# Altium PCB FPV0-3.PcbDoc (part 1 of 6)
Units mm, origin at the board's own origin, x right, y up, seen from the top; angles counter-clockwise.
Board outline 81.28 x 53.34 mm, 4 copper layers (Top Layer, GND Plane 1, 3v3 Plane 2, Bottom Layer); 178 components, 250 nets, 836 pads, 217 vias.
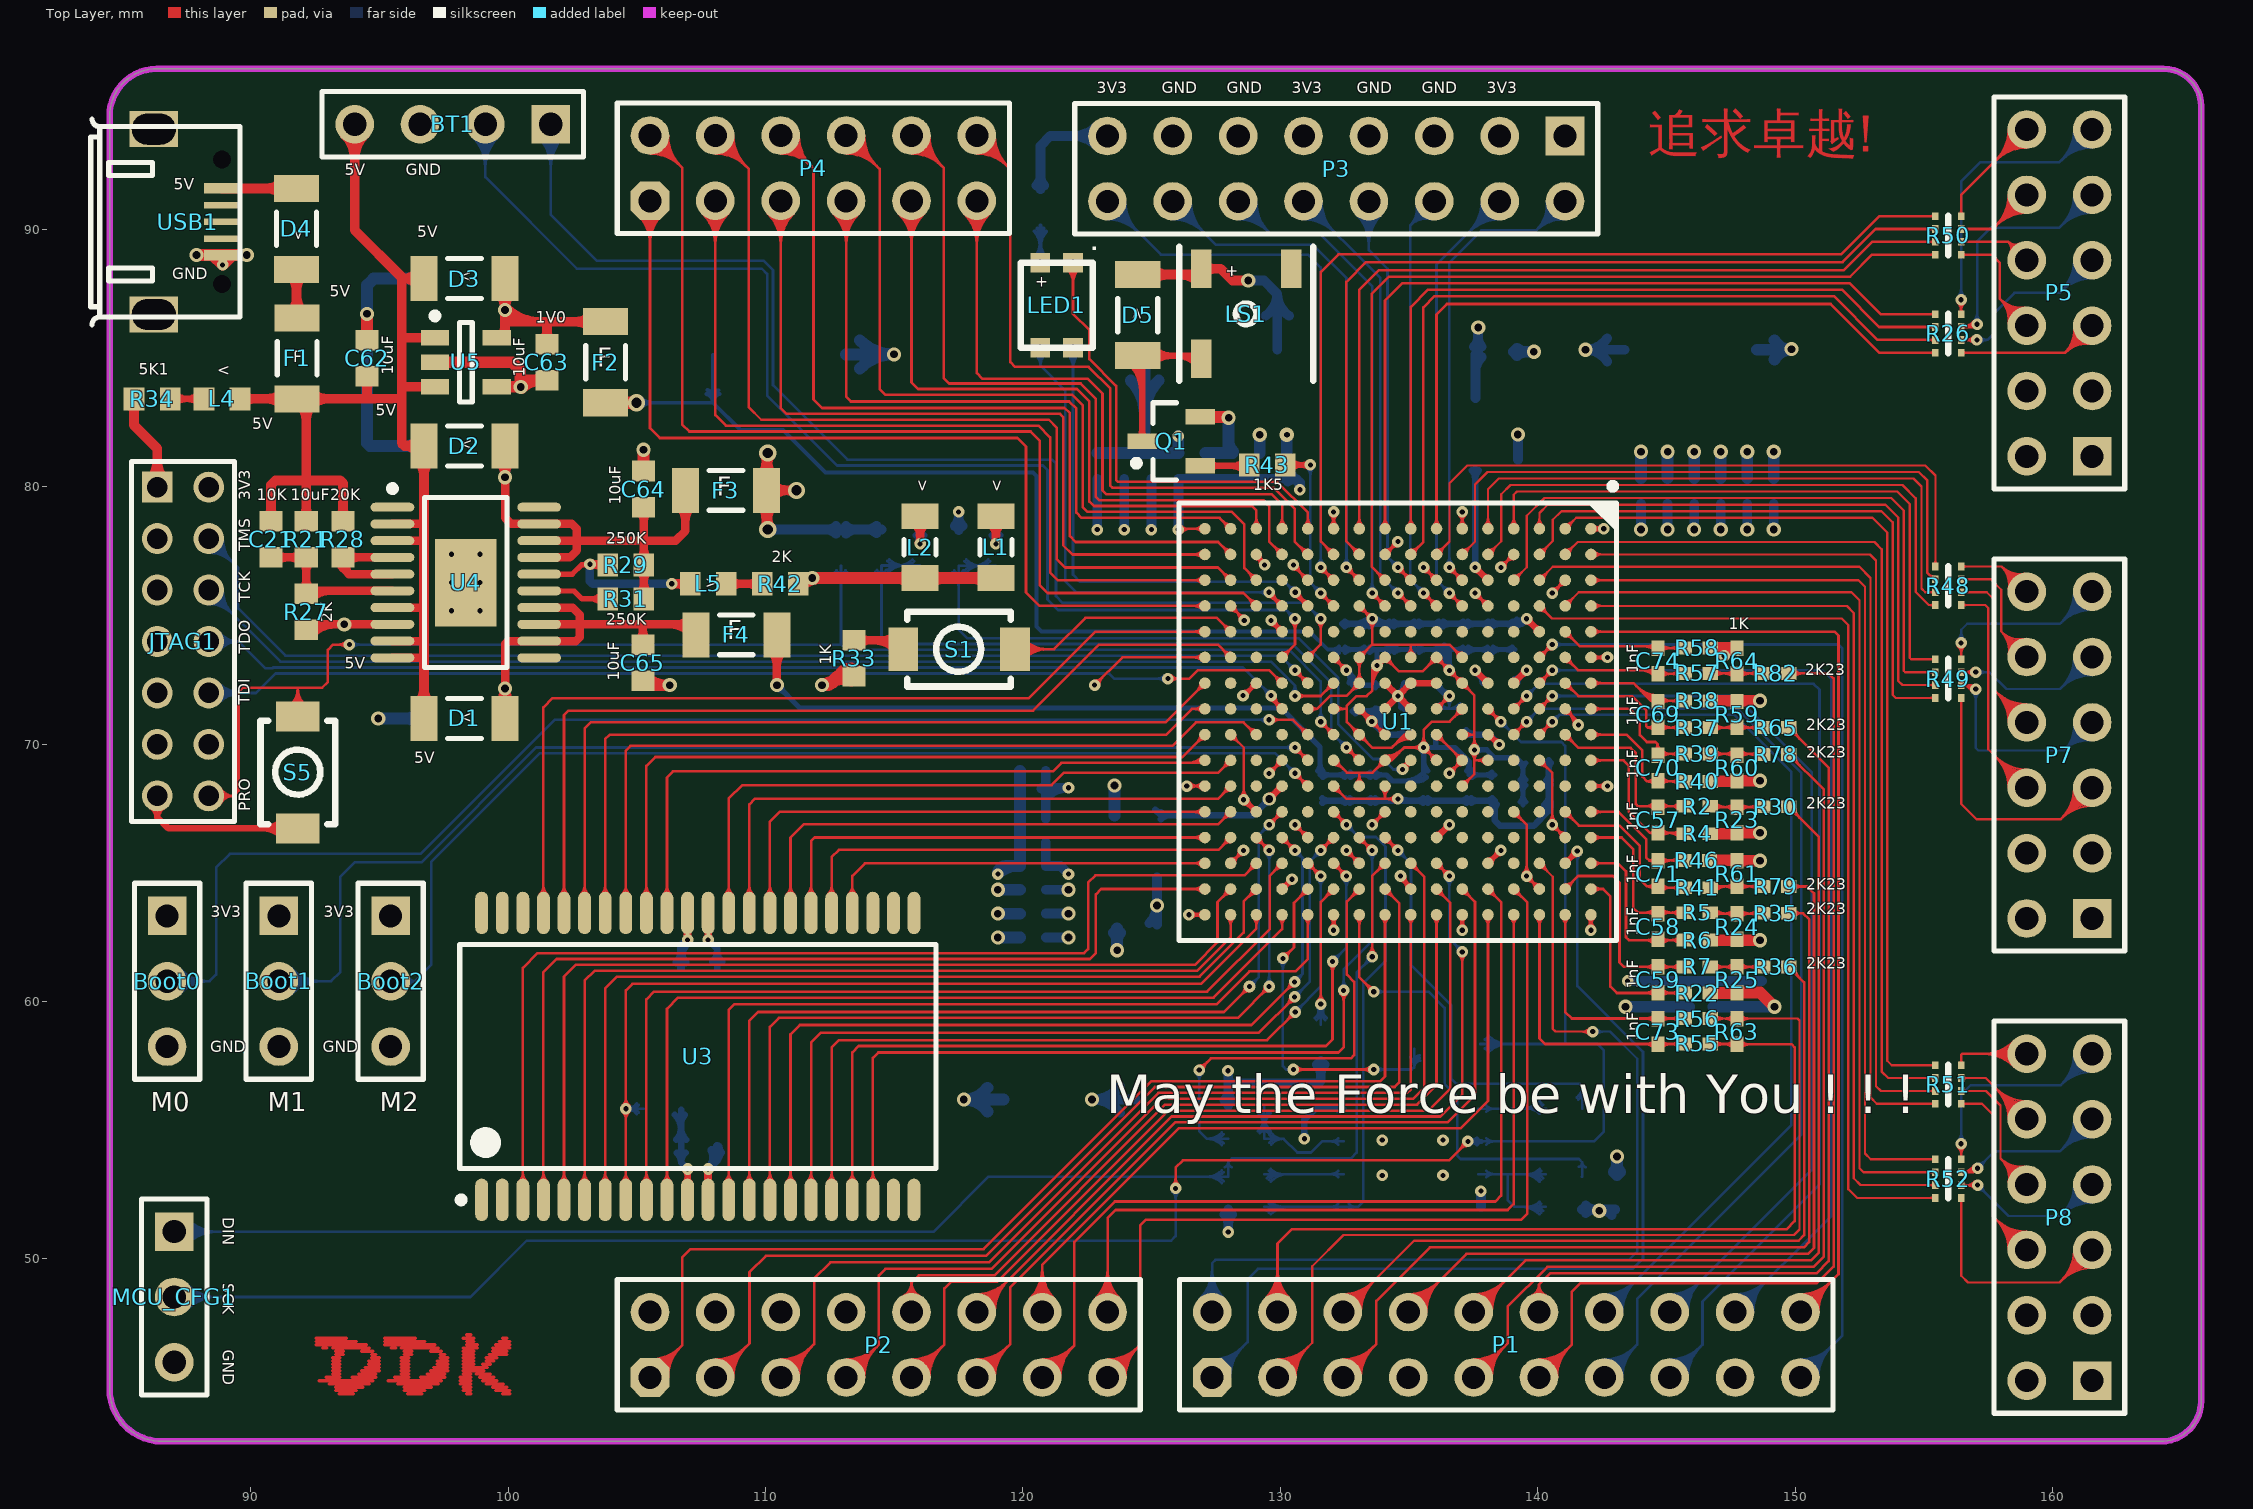
[diagram p0: Top Layer view]
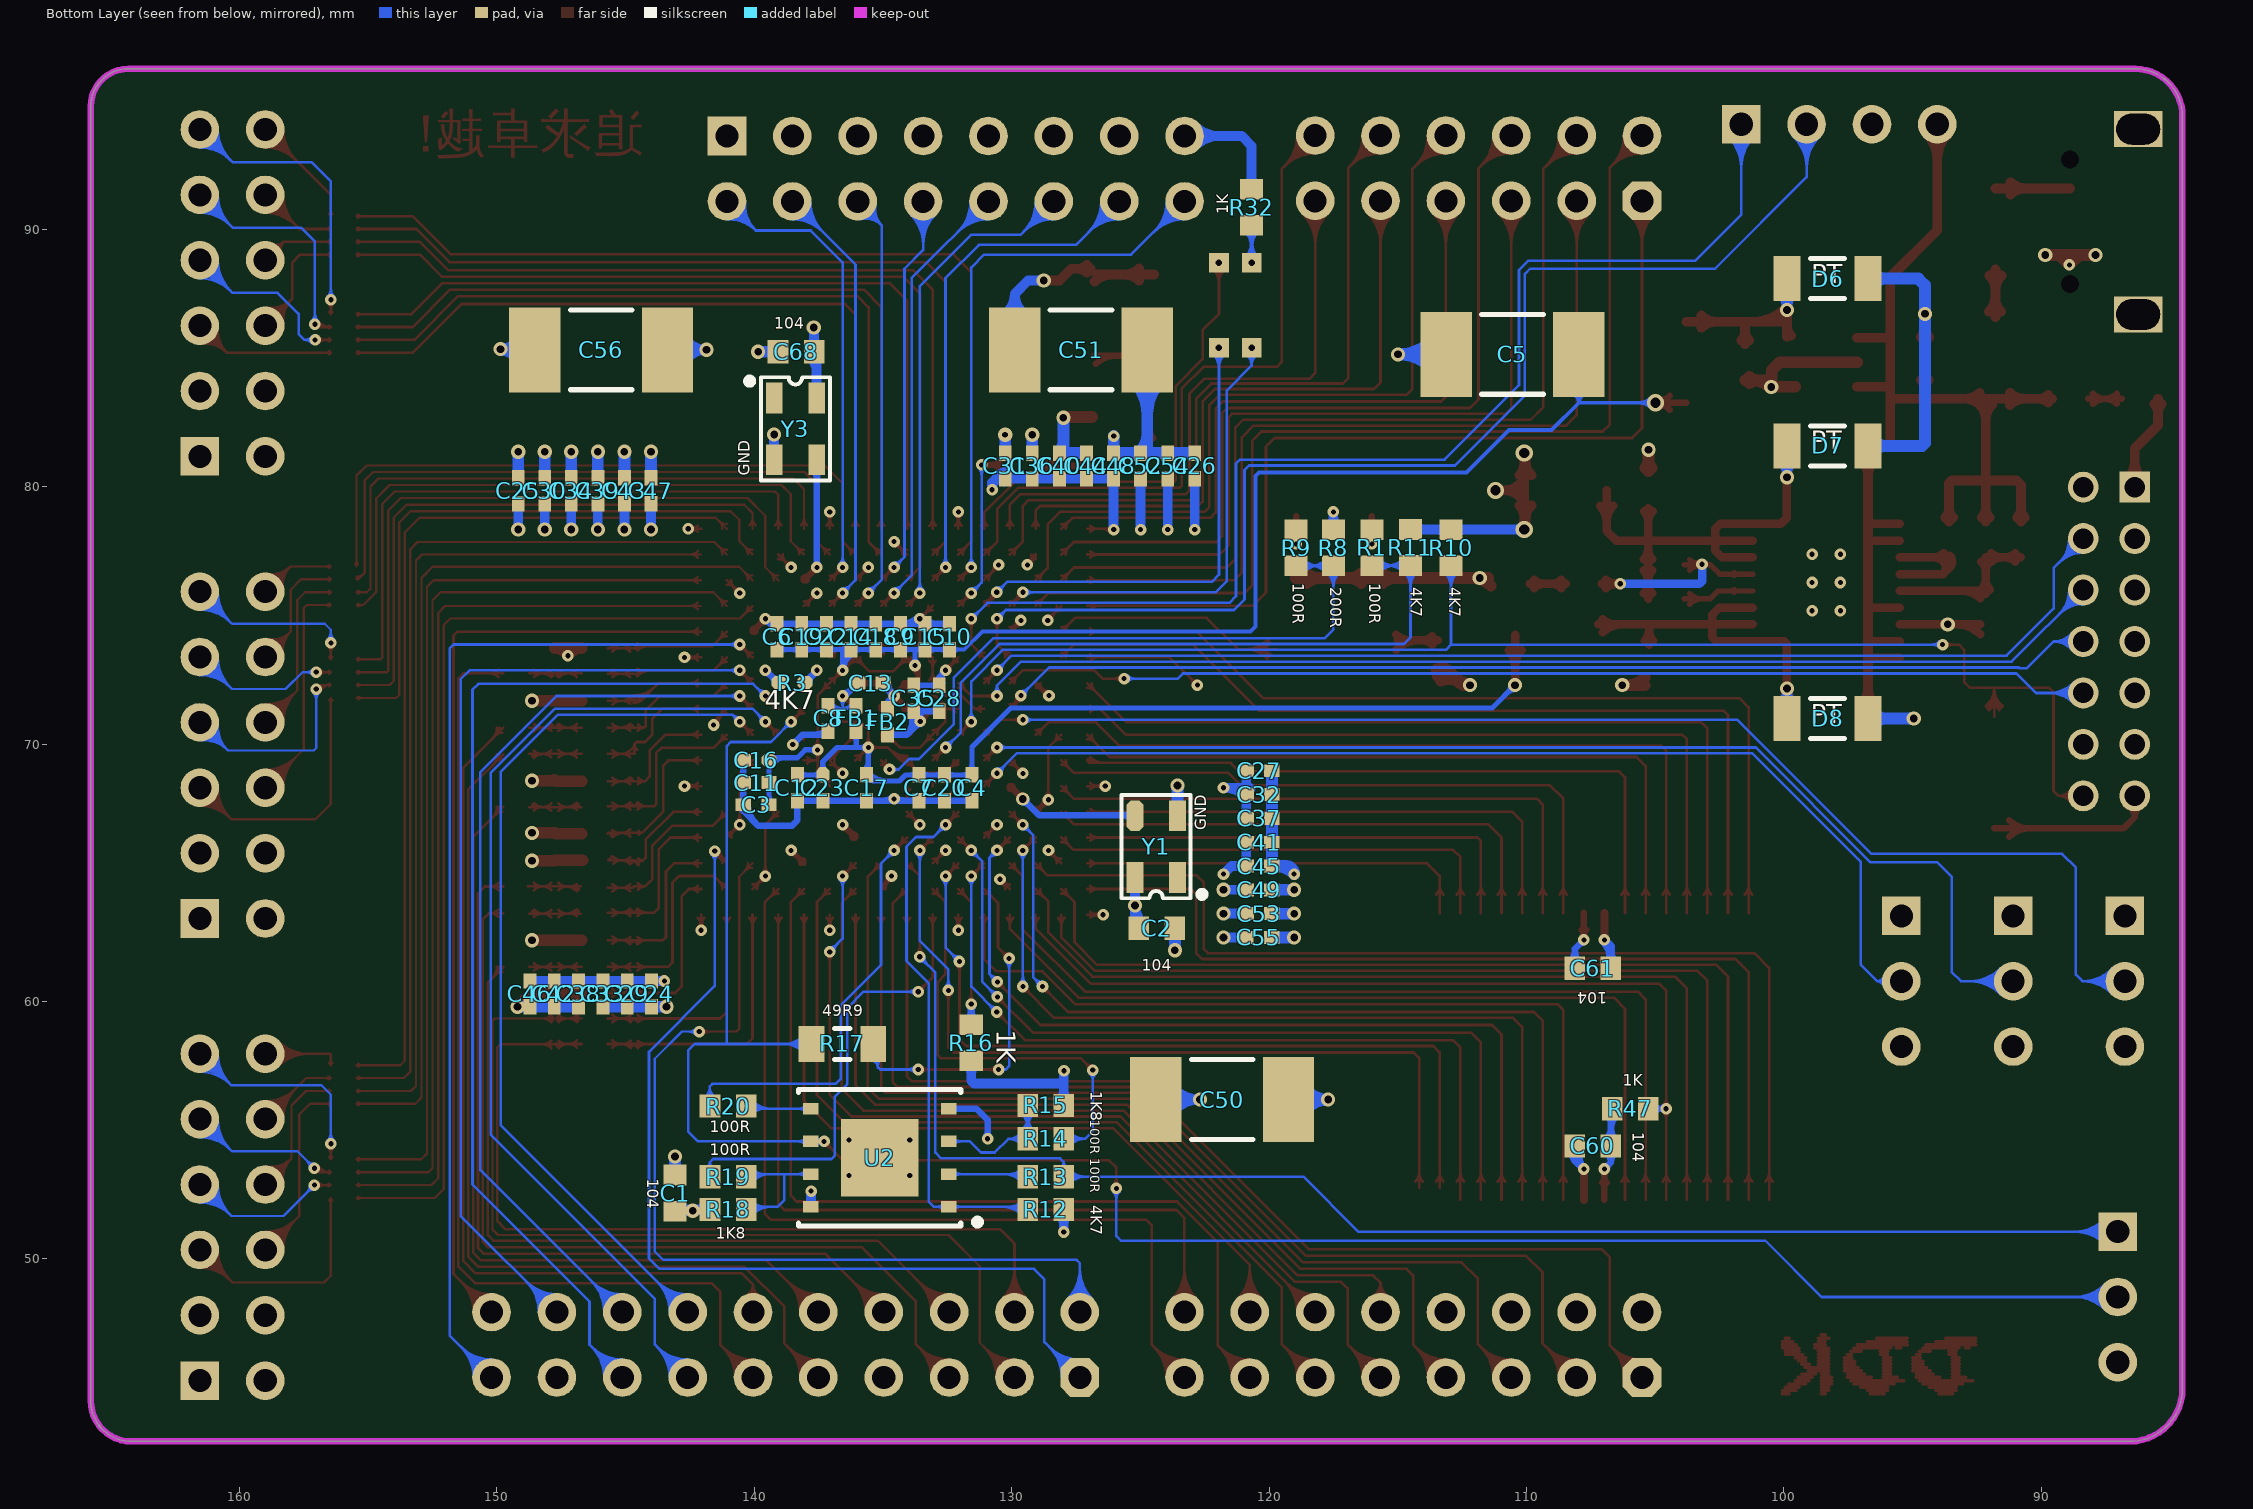
[diagram p1: Bottom Layer view, seen from below]
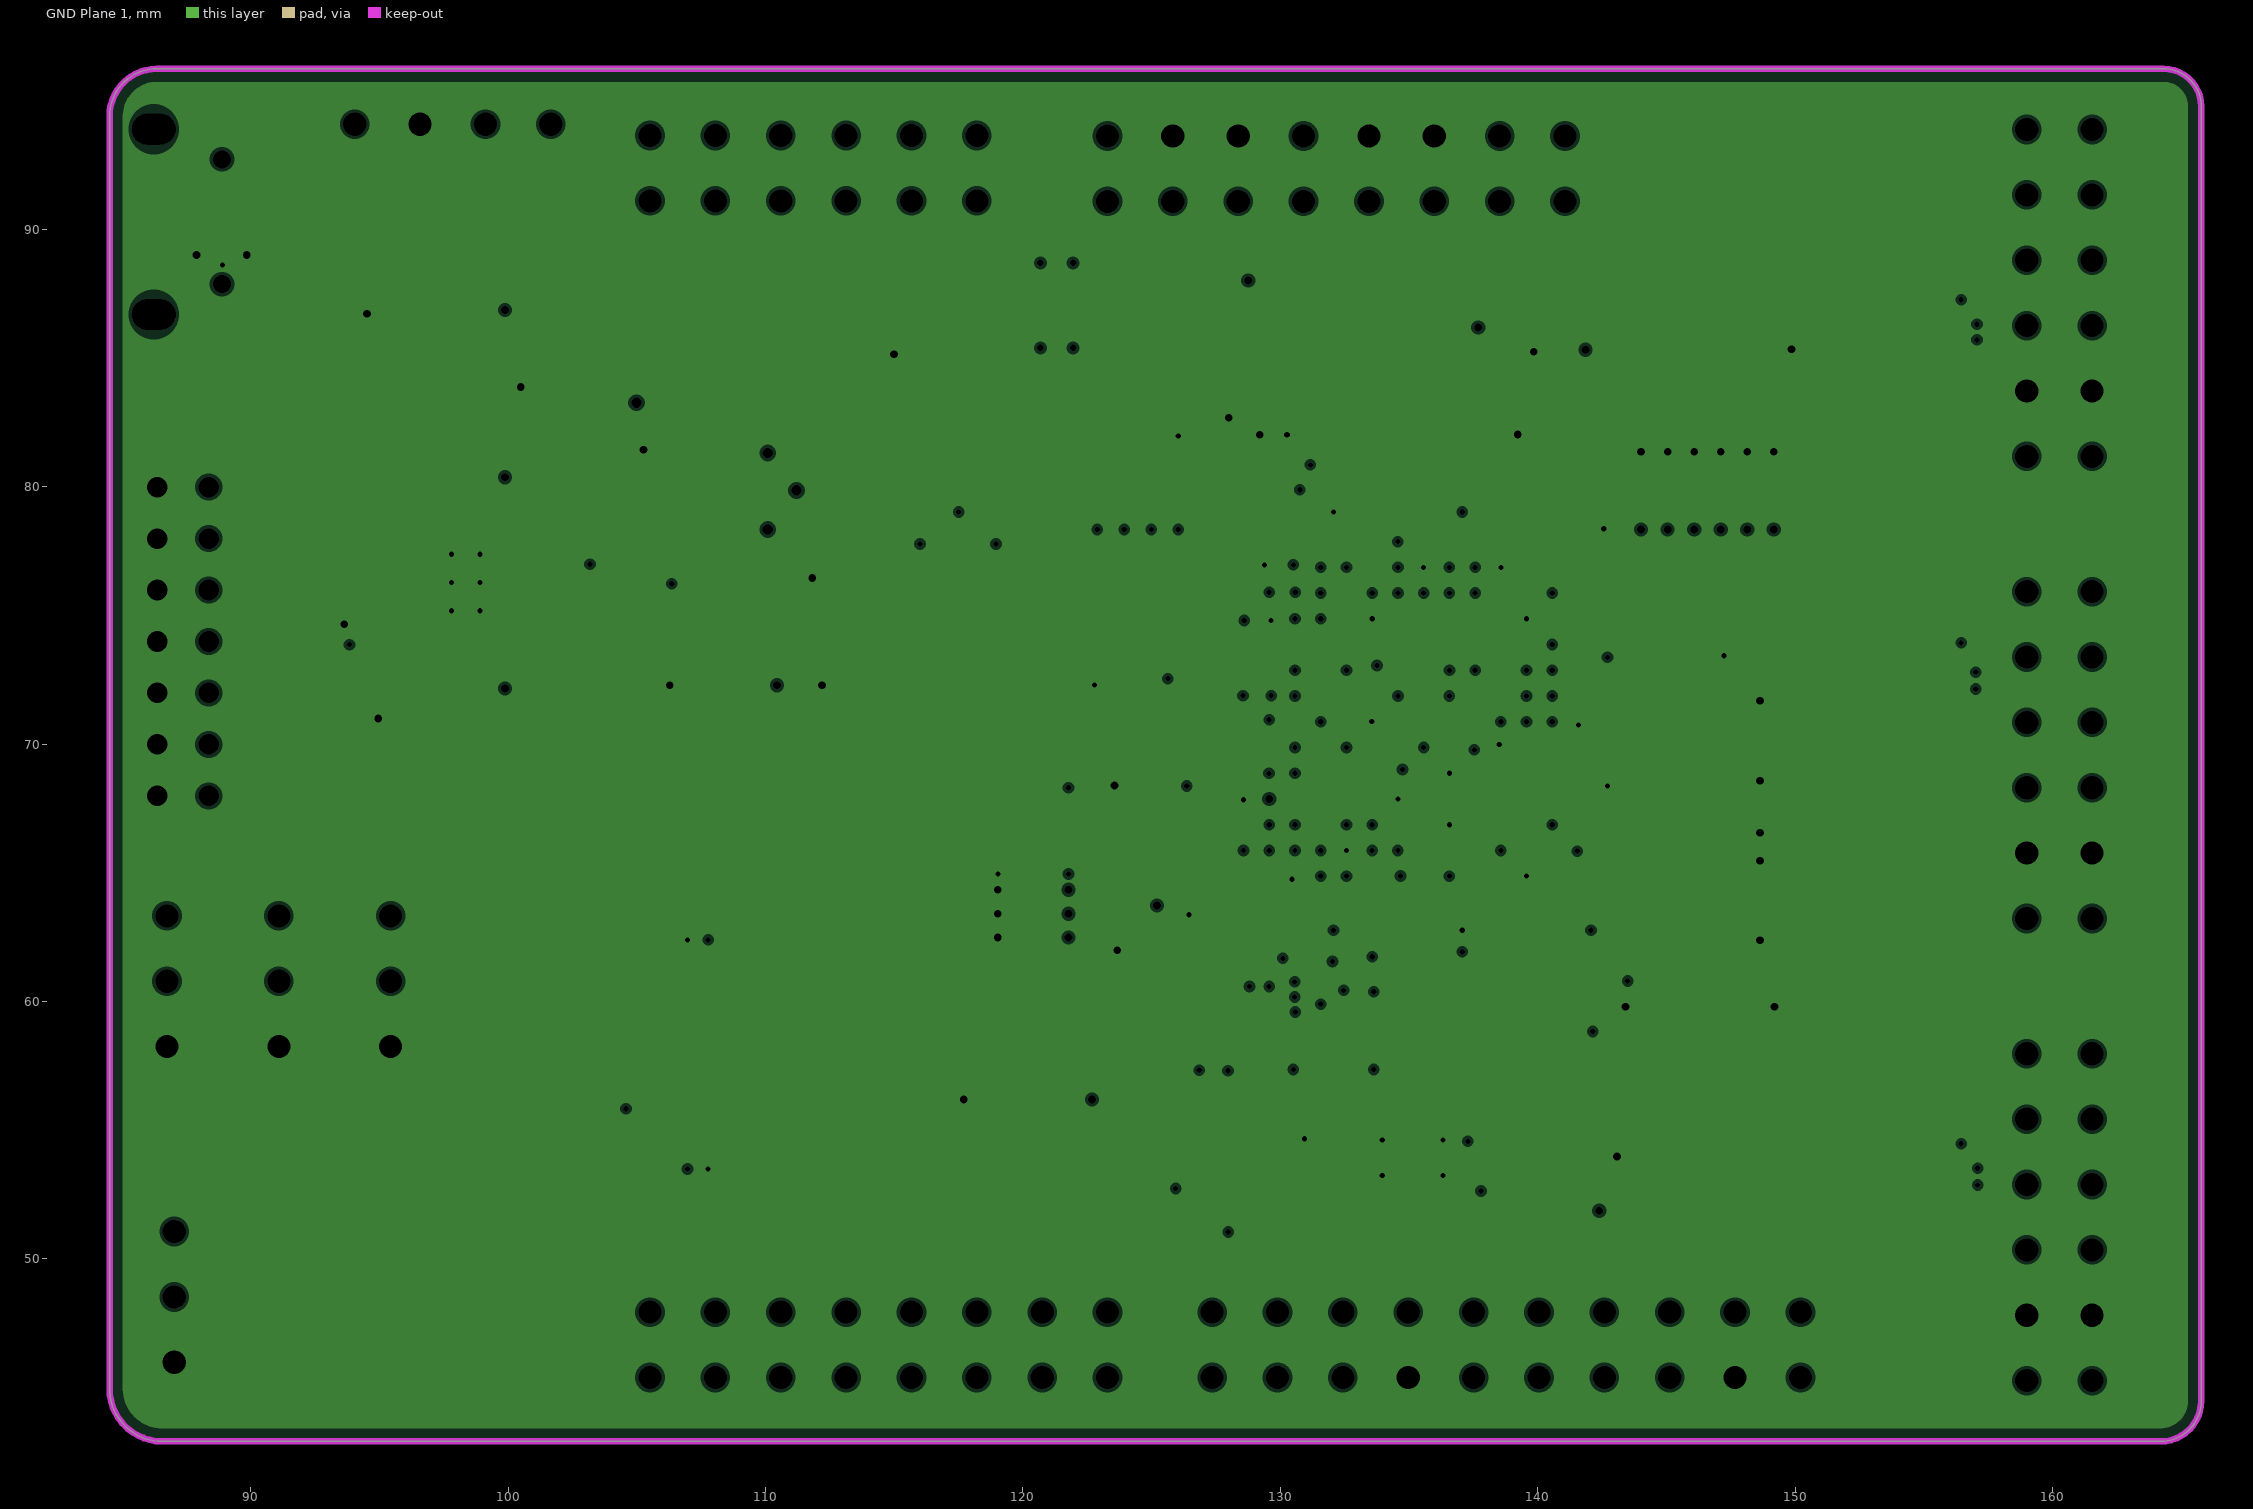
[diagram p2: GND Plane 1, clearances drawn from the general rule]
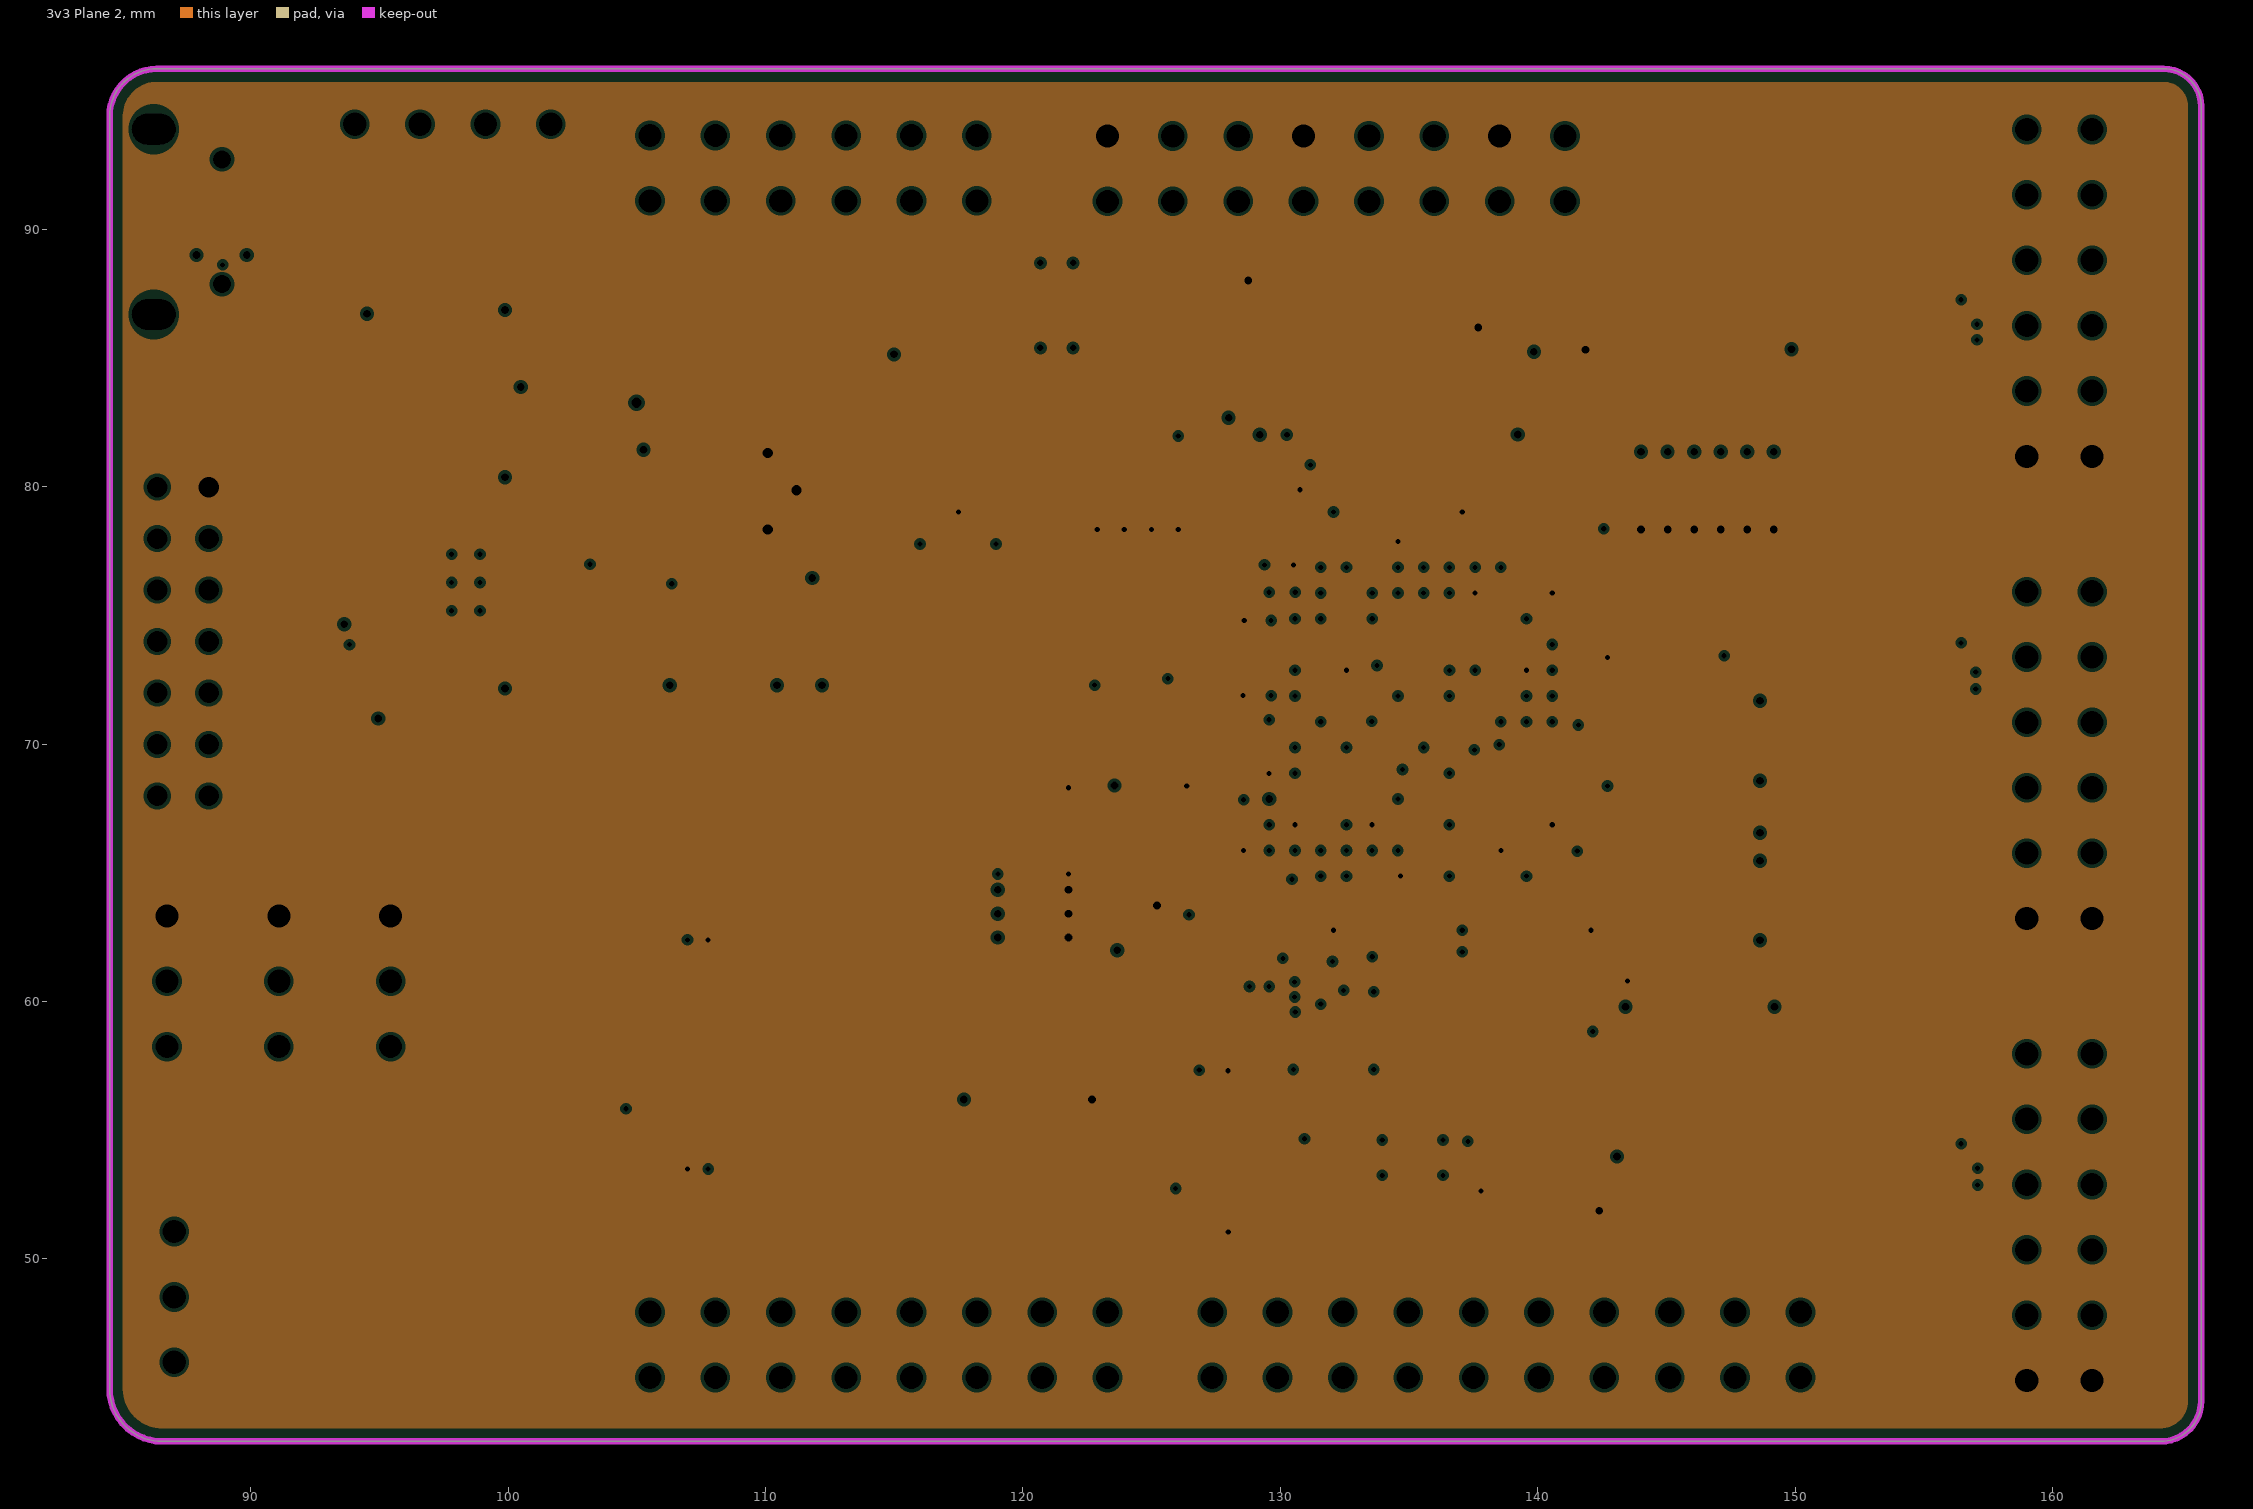
[diagram p3: 3v3 Plane 2, clearances drawn from the general rule]

## Layer stack, top to bottom
Top Layer: signal copper 0.0356
Dielectric: core 0.32, FR-4, Dk 4.8
GND Plane 1: plane copper 0.0356, net GND
Dielectric: prepreg 0.32, FR-4, Dk 4.8
3v3 Plane 2: plane copper 0.0356, net 3V3
Dielectric: core 0.32, FR-4, Dk 4.8
Bottom Layer: signal copper 0.0356

## Board outline
84.506,44.951 84.506,94.401 cw(c86.346,94.401) 86.346,96.241 164.316,96.241 cw(c164.316,94.771) 165.786,94.771 165.786,44.481 cw(c164.206,44.481) 164.206,42.901 86.556,42.901 cw(c86.556,44.951)

## Design rules (kind name [scope] priority, off if disabled: settings)
Clearance ne2rvia [(IsPad OR IsVia)] p1: gap=0.127
Clearance all [All] p2: gap=0.089
DiffPairsRouting [All] p1: maxlimit=0.254 minlimit=0.254 mostfreqgap=0.254 maxuncoupledlength=12.7
PlaneClearance [All] p1: clearance=0.127
PlaneConnect [All] p1: planeconnectstyle=Direct reliefexpansion=0.508 reliefentries=4 reliefconductorwidth=0.254 reliefairgap=0.254
PolygonConnect [All] p1: connectstyle=Relief reliefconductorwidth=0.254 reliefentries=4 polygonreliefangle="90 Angle" airgapwidth=0.254
RoutingVias [All] p1: holewidth=0.711 width=1.27 viastyle="Through Hole" minholewidth=0.2 minwidth=0.45 maxholewidth=0.711 maxwidth=1.27
SolderMaskExpansion [All] p1: expansion=0.025
Width [All] p1: maxlimit=1.27 minlimit=0.089 preferedwidth=0.254 minimp=50.000000 maximp=50.000000 favimp=50.000000
25 further rules are at their usual default settings.

## Classes and differential pairs
net class QEI_B[3..0]: QEI_B1 QEI_B2 QEI_B3
component class power: C21 C62 C63 C64 C65 D1 D2 D3 D4 D6 D7 D8 F1 F2 F3 F4 L4 L5 R21 R27 R28 R29 R31 R34 R42 U4 U5 USB1
net class SRAM-DQ[7..0]: SRAM-DQ0 SRAM-DQ1 SRAM-DQ2 SRAM-DQ3 SRAM-DQ4 SRAM-DQ5 SRAM-DQ6 SRAM-DQ7
net class SRAM-A[18..0]: SRAM-A0 SRAM-A1 SRAM-A2 SRAM-A3 SRAM-A4 SRAM-A5 SRAM-A6 SRAM-A7 SRAM-A8 SRAM-A9 SRAM-A10 SRAM-A11 SRAM-A12 SRAM-A13 SRAM-A14 SRAM-A15 SRAM-A16 SRAM-A17 SRAM-A18
net class BANK35_IO[42..1]: BANK35_IO1 BANK35_IO2 BANK35_IO3 BANK35_IO4 BANK35_IO5 BANK35_IO6 BANK35_IO7 BANK35_IO8 BANK35_IO9 BANK35_IO10 BANK35_IO11 BANK35_IO12 BANK35_IO13 BANK35_IO14 BANK35_IO15 BANK35_IO16 BANK35_IO17 BANK35_IO18 BANK35_IO19 BANK35_IO20 BANK35_IO21 BANK35_IO22 BANK35_IO23 BANK35_IO24 BANK35_IO25 BANK35_IO26 BANK35_IO27 BANK35_IO28 BANK35_IO29 BANK35_IO30 BANK35_IO31 BANK35_IO32 BANK35_IO33 BANK35_IO34 BANK35_IO35 BANK35_IO36 BANK35_IO37 BANK35_IO38 BANK35_IO39 BANK35_IO40 BANK35_IO41 BANK35_IO42 IO0
component class FPGA_CFG: Boot0 Boot1 Boot2 JTAG1 L1 L2 MCU_CFG1 R1 R3 R8 R9 R10 R11 S5 U1
component class MEMORY: C60 C61 R47 U3
component class IO: BT1 C57 C58 C59 C69 C70 C71 C73 C74 D5 LED1 LS1 P1 P2 P3 P4 P5 P7 P8 Q1 R2 R4 R5 R6 R7 R22 R23 R24 R25 R26 R30 R32 R33 R35 R36 R37 R38 R39 R40 R41 R43 R46 R48 R49 R50 R51 R52 R55 R56 R57 R58 R59 R60 R61 R63 R64 R65 R78 R79 R82 S1
component class FPGA_IO: C1 C2 C68 R12 R13 R14 R15 R16 R17 R18 R19 R20 U2 Y1 Y3
component class FPGA_POWER: C3 C4 C5 C6 C7 C8 C9 C10 C11 C12 C13 C14 C15 C16 C17 C18 C19 C20 C22 C23 C24 C25 C26 C27 C28 C29 C30 C31 C32 C33 C34 C35 C36 C37 C38 C39 C40 C41 C42 C43 C44 C45 C46 C47 C48 C49 C50 C51 C52 C53 C54 C55 C56 FB1 FB2
net class BANK14_IO[10..1]: BANK14_IO1 BANK14_IO2 BANK14_IO3 BANK14_IO4 BANK14_IO5 BANK14_IO6 BANK14_IO7 BANK14_IO8 BANK14_IO9 BANK14_IO10
net class BANK15_IO[36..1]: BANK15_IO1 BANK15_IO2 BANK15_IO3 BANK15_IO4 BANK15_IO5 BANK15_IO6 BANK15_IO7 BANK15_IO8 BANK15_IO9 BANK15_IO10 BANK15_IO11 BANK15_IO12 BANK15_IO13 BANK15_IO14 BANK15_IO15 BANK15_IO16 BANK15_IO17 BANK15_IO18 BANK15_IO19 BANK15_IO20 BANK15_IO21 BANK15_IO22 BANK15_IO23 BANK15_IO24 BANK15_IO25 BANK15_IO26 BANK15_IO27 BANK15_IO28 BANK15_IO29 BANK15_IO30 BANK15_IO31 BANK15_IO32 BANK15_IO33 BANK15_IO34 BANK15_IO35 BANK15_IO36
net class BANK34_IO[20..1]: BANK34_IO1 BANK34_IO2 BANK34_IO3 BANK34_IO4 BANK34_IO5 BANK34_IO6 BANK34_IO7 BANK34_IO8 BANK34_IO9 BANK34_IO10 BANK34_IO11 BANK34_IO12 BANK34_IO13 BANK34_IO14 BANK34_IO15 BANK34_IO16 BANK34_IO17 BANK34_IO18 BANK34_IO19 BANK34_IO20
differential pair AD12: +AD12_P -AD12_N
differential pair AD11: +AD11_P -AD11_N
differential pair AD10: +AD10_P -AD10_N
differential pair AD9: +AD9_P -AD9_N
differential pair AD8: +AD8_P -AD8_N
differential pair AD4: +AD4_P -AD4_N
differential pair AD3: +AD3_P -AD3_N
differential pair AD2: +AD2_P -AD2_N
differential pair AD1: +AD1_P -AD1_N

## Components (designator, comment, footprint, x,y, rotation, side; value= is the part's Value field where it differs from the comment)
Boot0 "Header 3" HDR1X3 86.741,63.322 r270 top
Boot1 "Header 3" HDR1X3 91.084,63.322 r270 top
Boot2 "Header 3" HDR1X3 95.428,63.322 r270 top
BT1 "Header 4" HDR1X4 101.651,94.082 r180 top
C1 "Cap" 1608[0603] 143.078,52.553 r90 bottom (schematic designator C16)
C2 "Cap" 1608[0603] 124.358,62.84 r0 bottom
C3 "Cap" 0402#1 139.929,67.64 r0 bottom
C4 "Cap" 0402#1 131.547,68.301 r270 bottom
C5 "Cap" 2512 110.541,85.141 r0 bottom (schematic designator C20)
C6 "Cap" 0402#1 139.116,74.168 r90 bottom (schematic designator C53)
C7 "Cap" 0402#1 133.604,68.301 r270 bottom
C8 "Cap" 0402#1 137.135,70.993 r90 bottom (schematic designator C29)
C9 "Cap" 0402#1 134.326,74.168 r90 bottom (schematic designator C30)
C10 "Cap" 0402#1 132.41,74.168 r90 bottom (schematic designator C31)
C11 "Cap" 0402#1 139.929,68.504 r0 bottom
C12 "Cap" 0402#1 138.328,68.301 r270 bottom
C13 "Cap" 0402#1 135.484,72.365 r180 bottom (schematic designator C56)
C14 "Cap" 0402#1 136.242,74.168 r90 bottom (schematic designator C96)
C15 "Cap" 0402#1 133.368,74.168 r90 bottom (schematic designator C95)
C16 "Cap" 0402#2 139.929,69.367 r0 bottom
C17 "Cap" 0402#1 135.636,68.301 r270 bottom
C18 "Cap" 0402#1 135.284,74.168 r90 bottom (schematic designator C91)
C19 "Cap" 0402#1 138.158,74.168 r90 bottom (schematic designator C92)
C20 "Cap" 0402#1 132.613,68.301 r270 bottom (schematic designator C90)
C21 "Cap" 1608[0603] 90.78,77.953 r270 top
C22 "Cap" 0402#1 137.2,74.168 r90 bottom (schematic designator C75)
C23 "Cap" 0402#2 137.338,68.301 r270 bottom
C24 "Cap" 0402#1 143.993,60.292 r270 bottom
C25 "Cap" 0402#1 149.174,79.84 r90 bottom
C26 "Cap" 0402#1 122.885,80.805 r90 bottom
C27 "Cap" 0402#1 120.388,68.961 r180 bottom
C28 "Cap" 0402#1 132.817,71.78 r90 bottom
C29 "Cap" 0402#1 144.937,60.292 r270 bottom
C30 "Cap" 0402#1 148.143,79.84 r90 bottom
C31 "Cap" 0402#1 130.251,80.805 r90 bottom
C32 "Cap" 0402#1 120.388,68.036 r180 bottom
C33 "Cap" 0402#1 145.882,60.292 r270 bottom
C34 "Cap" 0402#1 147.112,79.84 r90 bottom
C35 "Cap" 0402#1 133.807,71.78 r90 bottom
C36 "Cap" 0402#1 129.199,80.805 r90 bottom
C37 "Cap" 0402#1 120.388,67.11 r180 bottom
C38 "Cap" 0402#1 146.827,60.292 r270 bottom
C39 "Cap" 0402#1 146.08,79.84 r90 bottom
C40 "Cap" 0402#1 128.147,80.805 r90 bottom
C41 "Cap" 0402#1 120.388,66.185 r180 bottom
C42 "Cap" 0402#1 147.772,60.292 r270 bottom
C43 "Cap" 0402#1 145.049,79.84 r90 bottom
C44 "Cap" 0402#1 127.094,80.805 r90 bottom
C45 "Cap" 0402#1 120.388,65.26 r180 bottom
C46 "Cap" 0402#1 148.717,60.292 r270 bottom
C47 "Cap" 0402#1 144.018,79.84 r90 bottom
C48 "Cap" 0402#1 126.042,80.805 r90 bottom
C49 "Cap" 0402#1 120.388,64.335 r180 bottom
C50 "Cap" 2512 121.818,56.185 r180 bottom
C51 "Cap" 2512 127.305,85.319 r180 bottom
C52 "Cap" 0402#1 124.99,80.805 r90 bottom
C53 "Cap" 0402#1 120.388,63.409 r180 bottom
C54 "Cap" 0402#1 123.937,80.805 r90 bottom
C55 "Cap" 0402#1 120.396,62.484 r180 bottom
C56 "Cap" 2512 145.948,85.319 r0 bottom
C57 "Cap" 0402#1 144.678,67.048 r90 top (schematic designator C52)
C58 "Cap" 0402#1 144.678,62.909 r90 top (schematic designator C39)
C59 "Cap" 0402#1 144.678,60.841 r90 top (schematic designator C40)
C60 "Cap" 1608[0603] 107.417,54.381 r180 bottom (schematic designator C41)
C61 "Cap" 1608[0603] 107.417,61.29 r180 bottom (schematic designator C42)
C62 "Cap" 1608[0603] 94.513,84.988 r270 top (schematic designator C43)
C63 "Cap" 1608[0603] 101.498,84.836 r270 top (schematic designator C44)
C64 "Cap" 1608[0603] 105.258,79.908 r90 top (schematic designator C32)
C65 "Cap" 1608[0603] 105.232,73.152 r270 top (schematic designator C33)
C68 "Cap" 1608[0603] 138.379,85.242 r180 bottom
C69 "Cap" 0402#1 144.678,71.152 r270 top
C70 "Cap" 0402#1 144.678,69.071 r90 top
C71 "Cap" 0402#1 144.678,64.967 r270 top
C73 "Cap" 0402#1 144.67,58.828 r270 top
C74 "Cap" 0402#1 144.678,73.228 r270 top
D1 "SK34" 1206 98.298,70.993 r180 top
D2 "SK34" 1206 98.298,81.585 r180 top
D3 "SK34" 1206 98.298,88.087 r180 top
D4 "SK34" 1206 91.77,90.018 r270 top
D5 "SK34" 1206 124.46,86.665 r90 top
D6 "稳压" 1206 98.298,88.087 r0 bottom
D7 "稳压" 1206 98.298,81.585 r0 bottom
D8 "稳压" 1206 98.298,70.993 r0 bottom
F1 "Fuse 1" 1206 91.796,84.988 r90 top
F2 "Fuse 1" 1206 103.784,84.836 r90 top
F3 "Fuse 1" 1206 108.458,79.858 r180 top
F4 "Fuse 1" 1206 108.864,74.244 r180 top
FB1 "Inductor" 0402#1 136.042,70.993 r90 bottom (schematic designator FB2)
FB2 "Inductor" 0402#1 134.823,70.866 r90 bottom (schematic designator FB1)
JTAG1 "MHDR2X7" "Hearder2 7X2" 86.36,79.985 r0 top
L1 "LED" C2012 118.948,77.648 r270 top (schematic designator L8)
L2 "LED" C2012 116.002,77.648 r270 top
L4 "LED" 1608[0603] 88.875,83.414 r180 top
L5 "LED" 1608[0603] 107.772,76.225 r0 top
LED1 "RGB_LED1206" RGB 121.31,87.046 r270 top
LS1 "Bell" "MLT-5020 BZ" 128.676,86.716 r270 top
MCU_CFG1 "Header 3" HDR1X3 87.02,51.054 r270 top
P1 "Header 10X2" HDR2X10 127.351,45.386 r0 top
P2 "Header 8X2" HDR2X8#1 105.507,45.386 r0 top
P3 "Header 8X2" HDR2X8#2 141.062,93.626 r180 top
P4 "Header 6X2" HDR2X6#1 105.507,91.106 r0 top
P5 "Header 6X2" HDR2X6#2 161.544,81.178 r90 top
P7 "Header 6X2" HDR2X6#2 161.544,63.221 r90 top
P8 "Header 6X2" HDR2X6#2 161.544,45.263 r90 top
Q1 "QNPN" SOT23_N 125.755,81.763 r180 top
R1 "Res" 1608[0603] 116.002,77.622 r270 bottom
R2 "Res" 0402#1 146.202,67.581 r0 top
R3 "Res" 0402#3 138.532,72.39 r180 bottom (schematic designator R51)
R4 "Res" 0402#1 146.202,66.513 r0 top
R5 "Res" 0402#1 146.202,63.446 r0 top
R6 "Res" 0402#1 146.202,62.378 r0 top
R7 "Res" 0402#1 146.202,61.341 r0 top
R8 "Res" 1608[0603] 117.5,77.622 r90 bottom (schematic designator R63)
R9 "Res" 1608[0603] 118.948,77.622 r270 bottom (schematic designator R64)
R10 "Res" 1608[0603] 112.928,77.622 r90 bottom (schematic designator R55)
R11 "Res" 1608[0603] 114.503,77.637 r90 bottom (schematic designator R49)
R12 "Res" 1608[0603] 128.676,51.918 r0 bottom (schematic designator R66)
R13 "Res" 1608[0603] 128.676,53.188 r180 bottom (schematic designator R62)
R14 "Res" 1608[0603] 128.676,54.661 r180 bottom (schematic designator R54)
R15 "Res" 1608[0603] 128.676,55.956 r0 bottom (schematic designator R52)
R16 "Res" 1608[0603] 131.572,58.395 r90 bottom
R17 "Res" R2012 136.576,58.344 r180 bottom (schematic designator R59)
R18 "Res" 1608[0603] 141.021,51.918 r180 bottom (schematic designator R57)
R19 "Res" 1608[0603] 141.021,53.188 r180 bottom (schematic designator R37)
R20 "Res" 1608[0603] 141.021,55.931 r180 bottom
R21 "Res" 1608[0603] 92.151,77.953 r270 top
R22 "Res" 0402#1 146.202,60.325 r0 top
R23 "Res" 0402#1 147.752,67.048 r90 top
R24 "Res" 0402#1 147.752,62.909 r90 top (schematic designator R47)
R25 "Res" 0402#1 147.752,60.841 r90 top (schematic designator R48)
R26 "res*4" RES*4 155.956,85.954 r0 top
R27 "Res" 1608[0603] 92.151,75.133 r270 top
R28 "Res" 1608[0603] 93.574,77.953 r90 top
R29 "Res" 1608[0603] 104.572,76.962 r180 top
R30 "Res" 0402#1 149.25,67.564 r180 top (schematic designator R46)
R31 "Res" 1608[0603] 104.572,75.641 r180 top
R32 "Res" 1608[0603] 120.675,90.856 r90 bottom
R33 "Res" 1608[0603] 113.436,73.33 r90 top
R34 "Res" 1608[0603] 86.157,83.414 r0 top
R35 "Res" 0402#1 149.25,63.424 r180 top
R36 "Res" 0402#1 149.25,61.341 r180 top (schematic designator R21)
R37 "Res" 0402#1 146.202,70.637 r0 top (schematic designator R22)
R38 "Res" 0402#1 146.202,71.679 r0 top
R39 "Res" 0402#1 146.202,69.617 r0 top
R40 "Res" 0402#1 146.202,68.549 r0 top (schematic designator R20)
R41 "Res" 0402#1 146.202,64.414 r0 top (schematic designator R19)
R42 "Res" 1608[0603] 110.566,76.225 r180 top
R43 "Res2" 1608[0603] 129.489,80.848 r0 top
R46 "Res" 0402#1 146.177,65.481 r0 top (schematic designator R14)
R47 "Res" 1608[0603] 105.969,55.829 r0 bottom (schematic designator R13)
R48 "res*4" RES*4 155.956,76.149 r180 top
R49 "res*4" RES*4 155.956,72.542 r180 top
R50 "res*4" RES*4 155.956,89.764 r180 top
R51 "res*4" RES*4 155.956,56.769 r180 top
R52 "res*4" RES*4 155.956,53.111 r180 top
R55 "Res" 0402#1 146.202,58.344 r0 top
R56 "Res" 0402#1 146.202,59.334 r0 top
R57 "Res" 0402#1 146.202,72.746 r0 top
R58 "Res" 0402#1 146.202,73.736 r0 top
R59 "Res" 0402#1 147.752,71.152 r270 top
R60 "Res" 0402#1 147.752,69.071 r90 top
R61 "Res" 0402#1 147.752,64.967 r270 top
R63 "Res" 0402#1 147.744,58.828 r270 top
R64 "Res" 0402#1 147.752,73.228 r270 top
R65 "Res" 0402#1 149.25,70.637 r180 top
R78 "Res" 0402#1 149.25,69.596 r180 top
R79 "Res" 0402#1 149.25,64.465 r180 top
R82 "Res" 0402#1 149.25,72.746 r180 top
S1 "SW-PB" "key 3*4*2" 117.5,73.685 r180 top
S5 "SW-PB" "key 3*4*2" 91.821,68.91 r90 top
U1 "XC7A35T-1FTG256" BGA100P9X9-81A 134.569,70.866 r270 top
U2 "N25Q032A" QFN127P500X600X100_HS-9N 135.128,53.924 r0 bottom
U3 "IS61WV5128" "SOP127P600-8N IS61WV5128" 107.366,57.861 r90 top
U4 "TPS70151" TPS701 98.349,76.276 r0 top
U5 "TLV71210" TLV712 98.349,84.836 r0 top
USB1 "USB_5line" USB-MICRO-5P-2F 88.875,91.592 r90 top
Y1 "100MHZ" XTAL7_3225#1 124.384,66.015 r90 bottom
Y3 "XMHZ" XTAL7_3225#2 138.405,82.245 r270 bottom

## Footprints (in the part's own frame and the unit in brackets; to place one, negate y for a bottom-side part, rotate by r counter-clockwise, add the part's x,y. Pads: shape width x height; smd on the part's side, far side on the other; paste and mask are expansions set on the pad)
0402#1 [mm] "Chip Capacitor, Body 1.0x0.5mm, IPC High Density"
  rect 0.6x0.5 smd: 1(-0.5,0) 2(0.5,0)
  body extent -0.55,-0.3 0.55,0.3, height 1.3
0402#2 [mm] "Chip Capacitor, Body 1.0x0.5mm, IPC High Density"
  oct 0.6x0.5 smd: 1(-0.5,0)
  rect 0.6x0.5 smd: 2(0.5,0)
  body extent -0.55,-0.3 0.55,0.3, height 1.3
0402#3 [mm] "Chip Capacitor, Body 1.0x0.5mm, IPC High Density"
  oct 0.6x0.5 smd: 1(-0.5,0) 2(0.5,0)
  body extent -0.55,-0.3 0.55,0.3, height 1.3
1206 [mm]
  rect 1.05x1.75 smd: 1(-1.575,0) 2(1.575,0)
  silkscreen extent -0.65,-0.77 0.65,0.77, body extent -1.6,-0.8 1.6,0.8, height 1.6
1608[0603] [mm] "Chip Capacitor, Body 1.6x0.8mm, IPC High Density"
  rect 0.8x0.9 smd: 1(-0.7,0) 2(0.7,0)
  body extent -0.87,-0.48 0.87,0.48, height 1.3
2512 [mm]
  rect 2x3.3 smd: 1(-2.575,0) 2(2.575,0)
  silkscreen extent -1.2,-1.55 1.2,1.55, body extent -3.17,-1.6 3.17,1.6, height 0.65
BGA100P9X9-81A [mm] "XC7A35T-1FTG256"
  round 0.45 smd: A1(-7.5,7.5) A2(-6.5,7.5) A3(-5.5,7.5) A4(-4.5,7.5) A5(-3.5,7.5) A6(-2.5,7.5) A7(-1.5,7.5) A8(-0.5,7.5) A9(0.5,7.5) A10(1.5,7.5) A11(2.5,7.5) A12(3.5,7.5) A13(4.5,7.5) A14(5.5,7.5) A15(6.5,7.5) A16(7.5,7.5) B1(-7.5,6.5) B2(-6.5,6.5) B3(-5.5,6.5) B4(-4.5,6.5) B5(-3.5,6.5) B6(-2.5,6.5) B7(-1.5,6.5) B8(-0.5,6.5) B9(0.5,6.5) B10(1.5,6.5) B11(2.5,6.5) B12(3.5,6.5) B13(4.5,6.5) B14(5.5,6.5) B15(6.5,6.5) B16(7.5,6.5) C1(-7.5,5.5) C2(-6.5,5.5) C3(-5.5,5.5) C4(-4.5,5.5) C5(-3.5,5.5) C6(-2.5,5.5) C7(-1.5,5.5) C8(-0.5,5.5) C9(0.5,5.5) C10(1.5,5.5) C11(2.5,5.5) C12(3.5,5.5) C13(4.5,5.5) C14(5.5,5.5) C15(6.5,5.5) C16(7.5,5.5) D1(-7.5,4.5) D2(-6.5,4.5) D3(-5.5,4.5) D4(-4.5,4.5) D5(-3.5,4.5) D6(-2.5,4.5) D7(-1.5,4.5) D8(-0.5,4.5) D9(0.5,4.5) D10(1.5,4.5) D11(2.5,4.5) D12(3.5,4.5) D13(4.5,4.5) D14(5.5,4.5) D15(6.5,4.5) D16(7.5,4.5) E1(-7.5,3.5) E2(-6.5,3.5) E3(-5.5,3.5) E4(-4.5,3.5) E5(-3.5,3.5) E6(-2.5,3.5) E7(-1.5,3.5) E8(-0.5,3.5) E9(0.5,3.5) E10(1.5,3.5) E11(2.5,3.5) E12(3.5,3.5) E13(4.5,3.5) E14(5.5,3.5) E15(6.5,3.5) E16(7.5,3.5) F1(-7.5,2.5) F2(-6.5,2.5) F3(-5.5,2.5) F4(-4.5,2.5) F5(-3.5,2.5) F6(-2.5,2.5) F7(-1.5,2.5) F8(-0.5,2.5) F9(0.5,2.5) F10(1.5,2.5) F11(2.5,2.5) F12(3.5,2.5) F13(4.5,2.5) F14(5.5,2.5) F15(6.5,2.5) F16(7.5,2.5) G1(-7.5,1.5) G2(-6.5,1.5) G3(-5.5,1.5) G4(-4.5,1.5) G5(-3.5,1.5) G6(-2.5,1.5) G7(-1.5,1.5) G8(-0.5,1.5) G9(0.5,1.5) G10(1.5,1.5) G11(2.5,1.5) G12(3.5,1.5) G13(4.5,1.5) G14(5.5,1.5) G15(6.5,1.5) G16(7.5,1.5) H1(-7.5,0.5) H2(-6.5,0.5) H3(-5.5,0.5) H4(-4.5,0.5) H5(-3.5,0.5) H6(-2.5,0.5) H7(-1.5,0.5) H8(-0.5,0.5) H9(0.5,0.5) H10(1.5,0.5) H11(2.5,0.5) H12(3.5,0.5) H13(4.5,0.5) H14(5.5,0.5) H15(6.5,0.5) H16(7.5,0.5) J1(-7.5,-0.5) J2(-6.5,-0.5) J3(-5.5,-0.5) J4(-4.5,-0.5) J5(-3.5,-0.5) J6(-2.5,-0.5) J7(-1.5,-0.5) J8(-0.5,-0.5) J9(0.5,-0.5) J10(1.5,-0.5) J11(2.5,-0.5) J12(3.5,-0.5) J13(4.5,-0.5) J14(5.5,-0.5) J15(6.5,-0.5) J16(7.5,-0.5) K1(-7.5,-1.5) K2(-6.5,-1.5) K3(-5.5,-1.5) K4(-4.5,-1.5) K5(-3.5,-1.5) K6(-2.5,-1.5) K7(-1.5,-1.5) K8(-0.5,-1.5) K9(0.5,-1.5) K10(1.5,-1.5) K11(2.5,-1.5) K12(3.5,-1.5) K13(4.5,-1.5) K14(5.5,-1.5) K15(6.5,-1.5) K16(7.5,-1.5) L1(-7.5,-2.5) L2(-6.5,-2.5) L3(-5.5,-2.5) L4(-4.5,-2.5) L5(-3.5,-2.5) L6(-2.5,-2.5) L7(-1.5,-2.5) L8(-0.5,-2.5) L9(0.5,-2.5) L10(1.5,-2.5) L11(2.5,-2.5) L12(3.5,-2.5) L13(4.5,-2.5) L14(5.5,-2.5) L15(6.5,-2.5) L16(7.5,-2.5) M1(-7.5,-3.5) M2(-6.5,-3.5) M3(-5.5,-3.5) M4(-4.5,-3.5) M5(-3.5,-3.5) M6(-2.5,-3.5) M7(-1.5,-3.5) M8(-0.5,-3.5) M9(0.5,-3.5) M10(1.5,-3.5) M11(2.5,-3.5) M12(3.5,-3.5) M13(4.5,-3.5) M14(5.5,-3.5) M15(6.5,-3.5) M16(7.5,-3.5) N1(-7.5,-4.5) N2(-6.5,-4.5) N3(-5.5,-4.5) N4(-4.5,-4.5) N5(-3.5,-4.5) N6(-2.5,-4.5) N7(-1.5,-4.5) N8(-0.5,-4.5) N9(0.5,-4.5) N10(1.5,-4.5) N11(2.5,-4.5) N12(3.5,-4.5) N13(4.5,-4.5) N14(5.5,-4.5) N15(6.5,-4.5) N16(7.5,-4.5) P1(-7.5,-5.5) P2(-6.5,-5.5) P3(-5.5,-5.5) P4(-4.5,-5.5) P5(-3.5,-5.5) P6(-2.5,-5.5) P7(-1.5,-5.5) P8(-0.5,-5.5) P9(0.5,-5.5) P10(1.5,-5.5) P11(2.5,-5.5) P12(3.5,-5.5) P13(4.5,-5.5) P14(5.5,-5.5) P15(6.5,-5.5) P16(7.5,-5.5) R1(-7.5,-6.5) R2(-6.5,-6.5) R3(-5.5,-6.5) R4(-4.5,-6.5) R5(-3.5,-6.5) R6(-2.5,-6.5) R7(-1.5,-6.5) R8(-0.5,-6.5) R9(0.5,-6.5) R10(1.5,-6.5) R11(2.5,-6.5) R12(3.5,-6.5) R13(4.5,-6.5) R14(5.5,-6.5) R15(6.5,-6.5) R16(7.5,-6.5) T1(-7.5,-7.5) T2(-6.5,-7.5) T3(-5.5,-7.5) T4(-4.5,-7.5) T5(-3.5,-7.5) T6(-2.5,-7.5) T7(-1.5,-7.5) T8(-0.5,-7.5) T9(0.5,-7.5) T10(1.5,-7.5) T11(2.5,-7.5) T12(3.5,-7.5) T13(4.5,-7.5) T14(5.5,-7.5) T15(6.5,-7.5) T16(7.5,-7.5)
  silkscreen extent -9.27,-8.5 8.5,8.5, body extent -8.5,-8.5 8.5,8.5, height 1.55
C2012 [mm] "Chip Capacitor, 2-Leads, Body 2.0x1.2mm, IPC Low Density"
  rect 1x1.45 smd: 1(-1.2,0) 2(1.2,0)
  silkscreen extent -0.3,-0.63 0.3,0.63, body extent -0.98,-0.6 1.02,0.6, height 0.5
HDR1X3 [mm] "Connector; Header; 3 Position"
  rect 1.5x1.5 hole 0.9: 1(0,0)
  round 1.5 hole 0.9: 2(2.54,0) 3(5.08,0)
  silkscreen extent -1.27,-1.27 6.35,1.27, body extent -1.27,-1.27 6.35,1.27, height 7.58
HDR1X4 [mm] "Connector; Header; 4 Position"
  rect 1.5x1.5 hole 0.9: 1(0,0)
  round 1.5 hole 0.9: 2(2.54,0) 3(5.08,0) 4(7.62,0)
  silkscreen extent -1.27,-1.27 8.89,1.27
HDR2X6#1 [mm] "Connector; Header; 6x2 Position"
  oct 1.5x1.5 hole 0.9: 1(0,0)
  round 1.5 hole 0.9: 2(0,2.54) 3(2.54,0) 4(2.54,2.54) 5(5.08,0) 6(5.08,2.54) 7(7.62,0) 8(7.62,2.54) 9(10.16,0) 10(10.16,2.54) 11(12.7,0) 12(12.7,2.54)
  silkscreen extent -1.27,-1.27 13.97,3.81, body extent -1.27,-1.27 13.97,3.81, height 7.58
HDR2X6#2 [mm] "Connector; Header; 6x2 Position"
  rect 1.5x1.5 hole 0.9: 1(0,0)
  round 1.5 hole 0.9: 2(0,2.54) 3(2.54,0) 4(2.54,2.54) 5(5.08,0) 6(5.08,2.54) 7(7.62,0) 8(7.62,2.54) 9(10.16,0) 10(10.16,2.54) 11(12.7,0) 12(12.7,2.54)
  silkscreen extent -1.27,-1.27 13.97,3.81, body extent -1.27,-1.27 13.97,3.81, height 7.58
HDR2X8#1 [mm] "Connector; Header; 8x2 Position"
  oct 1.5x1.5 hole 0.9: 1(0,0)
  round 1.5 hole 0.9: 2(0,2.54) 3(2.54,0) 4(2.54,2.54) 5(5.08,0) 6(5.08,2.54) 7(7.62,0) 8(7.62,2.54) 9(10.16,0) 10(10.16,2.54) 11(12.7,0) 12(12.7,2.54) 13(15.24,0) 14(15.24,2.54) 15(17.78,0) 16(17.78,2.54)
  silkscreen extent -1.27,-1.27 19.05,3.81, body extent -1.27,-1.27 19.05,3.81, height 7.58
HDR2X8#2 [mm] "Connector; Header; 8x2 Position"
  rect 1.5x1.5 hole 0.9: 1(0,0)
  round 1.5 hole 0.9: 2(0,2.54) 3(2.54,0) 4(2.54,2.54) 5(5.08,0) 6(5.08,2.54) 7(7.62,0) 8(7.62,2.54) 9(10.16,0) 10(10.16,2.54) 11(12.7,0) 12(12.7,2.54) 13(15.24,0) 14(15.24,2.54) 15(17.78,0) 16(17.78,2.54)
  silkscreen extent -1.27,-1.27 19.05,3.81, body extent -1.27,-1.27 19.05,3.81, height 7.58
HDR2X10 [mm] "Connector; Header; 10x2 Position"
  oct 1.5x1.5 hole 0.9: 1(0,0)
  round 1.5 hole 0.9: 2(0,2.54) 3(2.54,0) 4(2.54,2.54) 5(5.08,0) 6(5.08,2.54) 7(7.62,0) 8(7.62,2.54) 9(10.16,0) 10(10.16,2.54) 11(12.7,0) 12(12.7,2.54) 13(15.24,0) 14(15.24,2.54) 15(17.78,0) 16(17.78,2.54) 17(20.32,0) 18(20.32,2.54) 19(22.86,0) 20(22.86,2.54)
  silkscreen extent -1.27,-1.27 24.13,3.81, body extent -1.27,-1.27 24.13,3.81, height 7.58
"Hearder2 7X2" [mm]
  rect 1.2x1.2 hole 0.8: 1(0,0)
  round 1.2 hole 0.8: 2(2,0) 3(0,-2) 4(2,-2) 5(0,-4) 6(2,-4) 7(0,-6) 8(2,-6) 9(0,-8) 10(2,-8) 11(0,-10) 12(2,-10) 13(0,-12) 14(2,-12)
  silkscreen extent -1,-13 3,1
"key 3*4*2" [mm]
  rect 1.15x1.7 smd: 1(-2.191,0) 2(2.159,0)
  silkscreen extent -2.03,-1.45 2,1.45
"MLT-5020 BZ" [mm]
  rect 1.5x0.8 smd: 0(-1.75,1.75) 1(-1.75,-1.75) 2(1.75,-1.75)
  silkscreen extent -2.6,-2.6 2.6,2.6
QFN127P500X600X100_HS-9N [mm] "QFN, 8-Leads, Body 5.00x6.00mm, Pitch 1.27mm, Thermal Pad 4.00x3.40mm, IPC Medium Density"
  rect 0.6x0.45 smd: 1(-2.675,1.905) 2(-2.675,0.635) 3(-2.675,-0.635) 4(-2.675,-1.905) 5(2.675,-1.905) 6(2.675,-0.635) 7(2.675,0.635) 8(2.675,1.905)
  rect 3x3 smd: 9(0,0)
  silkscreen extent -3.92,-2.65 3.15,2.65, body extent -3,-2.5 3,2.5, height 1
R2012 [mm] "Chip Resistor, 2-Leads, Body 2.0x1.2mm, IPC Low Density"
  rect 1x1.4 smd: 1(-1.2,0) 2(1.2,0)
  silkscreen extent -0.3,-0.6 0.3,0.6, body extent -0.98,-0.6 1.02,0.6, height 0.5
RES*4 [mm]
  rect 0.25x0.3 smd: 1(-0.5,0.75) 2(0.5,0.75) 3(-0.5,0.25) 4(0.5,0.25) 5(-0.5,-0.25) 6(0.5,-0.25) 7(-0.5,-0.75) 8(0.5,-0.75)
  silkscreen extent 0,-0.76 0,0.76
RGB [mil]
  rect 30x30 hole 10: 1(-65,25) 2(-65,-25) 3(65,-25) 4(65,25)
  silkscreen extent -90,-55 65,60
"SOP127P600-8N IS61WV5128" [mm] "IS61WV5128"
  oval 1.65x0.5 smd: 1(-5.575,8.4) 2(-5.575,7.6) 3(-5.575,6.8) 4(-5.575,6) 5(-5.575,5.2) 6(-5.575,4.4) 7(-5.575,3.6) 8(-5.575,2.8) 9(-5.575,2) 10(-5.575,1.2) 11(-5.575,0.4) 12(-5.575,-0.4) 13(-5.575,-1.2) 14(-5.575,-2) 15(-5.575,-2.8) 16(-5.575,-3.6) 17(-5.575,-4.4) 18(-5.575,-5.2) 19(-5.575,-6) 20(-5.575,-6.8) 21(-5.575,-7.6) 22(-5.575,-8.4) 23(5.575,-8.4) 24(5.575,-7.6) 25(5.575,-6.8) 26(5.575,-6) 27(5.575,-5.2) 28(5.575,-4.4) 29(5.575,-3.6) 30(5.575,-2.8) 31(5.575,-2) 32(5.575,-1.2) 33(5.575,-0.4) 34(5.575,0.4) 35(5.575,1.2) 36(5.575,2) 37(5.575,2.8) 38(5.575,3.6) 39(5.575,4.4) 40(5.575,5.2) 41(5.575,6) 42(5.575,6.8) 43(5.575,7.6) 44(5.575,8.4)
  silkscreen extent -5.7,-9.25 4.35,9.32, body extent -5.15,-9.25 5.15,9.25, height 1.2
SOT23_N [mm] "SOT23, 3-Leads, Body 2.9x1.3mm, Pitch 0.95mm, Lead Span 2.3mm - Reverse Pinning, IPC Medium Density"
  rect 1.15x0.6 smd: 1(1.125,0) 2(-1.125,-0.95) 3(-1.125,0.95)
  silkscreen extent -0.2,-1.5 1.47,1.5, body extent -0.7,-1.5 0.7,1.5, height 1.1
TLV712 [mm] "SOT23, 5-Leads, Body 2.90x2.80mm, Pitch 0.95mm, IPC Medium Density"
  rect 1.1x0.6 smd: 1(-1.2,0.95) 2(-1.2,0) 3(-1.2,-0.95) 4(1.2,-0.95) 5(1.2,0.95)
  silkscreen extent -1.32,-1.55 0.25,1.92, body extent -0.87,-1.52 0.87,1.53, height 1.45
TPS701 [mm] "TSOP, 20-Leads, Body 6.50x4.40mm, Pitch 0.65mm, Thermal Pad 3.40.2x2.40.2mm, IPC Medium Density"
  oval 1.7x0.35 smd: 1(-2.85,2.925) 2(-2.85,2.275) 3(-2.85,1.625) 4(-2.85,0.975) 5(-2.85,0.325) 6(-2.85,-0.325) 7(-2.85,-0.975) 8(-2.85,-1.625) 9(-2.85,-2.275) 10(-2.85,-2.925) 11(2.85,-2.925) 12(2.85,-2.275) 13(2.85,-1.625) 14(2.85,-0.975) 15(2.85,-0.325) 16(2.85,0.325) 17(2.85,0.975) 18(2.85,1.625) 19(2.85,2.275) 20(2.85,2.925)
  rect 2.4x3.4 smd: 21(0,0)
  silkscreen extent -2.97,-3.3 1.6,3.77, body extent -2.25,-3.3 2.25,3.3, height 1.2
USB-MICRO-5P-2F [mm]
  round 0 hole 0.7: 0(-3.725,0) 0(1.125,0)
  rect 0.4x1.4 smd: 1(0,0) 5(-2.6,0)
  rect 0.254x1.4 smd: 2(-0.65,0) 3(-1.3,0) 4(-1.95,0)
  rect 1.4x1.9 hole 1.2 slot 1.7 at 90 deg: 6(2.3,2.65) 7(-4.9,2.65)
  silkscreen extent -5.3,-0.7 2.7,5.1
XTAL7_3225#1 [mil]
  rect 47.2x25.6 smd: 1(-47.25,-32.5) 2(47.25,-32.5) 4(-47.25,32.5)
  oct 47.2x25.6 smd: 3(47.25,32.5)
  silkscreen extent -79,-75 79,53
XTAL7_3225#2 [mil]
  rect 47.2x25.6 smd: 1(-47.25,-32.5) 2(47.25,-32.5) 3(47.25,32.5) 4(-47.25,32.5)
  silkscreen extent -79,-75 79,53

## Part data
Boot0 Boot1 Boot2 MCU_CFG1: "Header, 3-Pin"
BT1: "Header, 4-Pin"
C1 C2 C3 C4 C5 C6 C7 C8 C9 C10 C11 C12 C13 C14 C15 C16 C17 C18 C19 C20 C21 C22 C23 C24 C25 C26 C27 C28 C29 C30 C31 C32 C33 C34 C35 C36 C37 C38 C39 C40 C41 C42 C43 C44 C45 C46 C47 C48 C49 C50 C51 C52 C53 C54 C55 C56 C57 C58 C59 C60 C61 C62 C63 C64 C65 C68 C69 C70 C71 C73 C74: "贴片电容"
D1 D2 D3 D4 D5 D6 D7 D8: library part "Diode 1N4148", "High Conductance Fast Diode"
F1 F2 F3 F4: "Fuse"
JTAG1: "Header, 7-Pin, Dual row"
LS1: "Electrical Bell"
P1: "Header, 10-Pin, Dual row"
P2 P3: "Header, 8-Pin, Dual row"
P4 P5 P7 P8: "Header, 6-Pin, Dual row"
Q1: "NPN Bipolar Transistor"
R1 R2 R3 R4 R5 R6 R7 R8 R9 R10 R11 R12 R13 R14 R15 R16 R17 R18 R19 R20 R21 R22 R23 R24 R25 R27 R28 R29 R30 R31 R32 R33 R34 R35 R36 R37 R38 R39 R40 R41 R42 R46 R47 R55 R56 R57 R58 R59 R60 R61 R63 R64 R65 R78 R79 R82: "贴片电阻"
R43: "Resistor"
S1 S5: "Switch"
U4: library part TPS701
U5: library part TLV712
Y1 Y3: library part XTAL1

## Via types
v1: diameter 0.45, hole 0.2, Top Layer to Bottom Layer, tented both sides, 150 vias
v2: diameter 0.55, hole 0.3, Top Layer to Bottom Layer, tented both sides, 55 vias
v3: diameter 0.45, hole 0.2, Top Layer to Bottom Layer, 6 vias
v4: diameter 0.666, hole 0.4, Top Layer to Bottom Layer, tented both sides, 4 vias
v5: diameter 0.513, hole 0.3, Top Layer to Bottom Layer, tented both sides, 1 vias
v6: diameter 0.55, hole 0.23, Top Layer to Bottom Layer, tented both sides, 1 vias

## Nets (pads, with @x,y where several pads share a name; then routed paths per layer and width w, separated by ;. In a path a pad name is that pad's centre, name@x,y a point inside that pad or via, vN(x,y) a via of type N, cw(c..) or ccw(c..) an arc to the next point about the centre after c; other vN are vias at no path point)
1V0: C3.1 C5.1 C6.1 C9.1 C10.1 C11.1 C14.1 C15.1 C16.1 C18.1 C19.1 C22.1 F2.1 U1.E10 U1.F7 U1.F9 U1.F11 U1.G6 U1.H9 U1.J6 U1.K9 U1.L8 | length 102.8
  Top Layer w0.102: U1.L8@132.069,71.366 132.588,71.366 ; U1.L8@132.192,71.243 cw(c132.49,70.945) 132.49,71.366 cw(c132.49,71.787) U1.L8@132.192,71.489 ; U1.K9@132.895,70.366 ccw(c132.474,70.366) 132.772,70.663 ccw(c133.069,70.961) U1.K9@133.069,70.54 ; U1.K9@133.069,70.192 cw(c133.069,69.771) 133.367,70.069 cw(c133.664,70.366) U1.K9@133.243,70.366 ; 133.579,72.201 cw(c134.606,72.201) v1@133.88,72.927 ; 133.579,72.446 cw(c134.361,72.446) v1@133.808,72.999 ; 133.579,72.691 cw(c134.116,72.691) v1@133.736,73.071 ; v1@133.598,72.979 cw(c133.513,72.941) 133.579,72.875 ; v1@133.682,72.893 ccw(c133.643,72.811) 133.579,72.875 ; v1@133.756,73.225 ccw(c133.756,73.638) U1.J6@134.049,73.346 ; v1@133.794,73.221 ccw(c133.811,73.3) 133.882,73.259 ccw(c133.956,73.217) v1@133.89,73.162 ; v1@133.864,73.187 ccw(c133.92,73.257) 133.964,73.18 ccw(c134.005,73.109) v1@133.926,73.091 ; U1.J6@133.895,73.366 cw(c133.474,73.366) 133.772,73.069 cw(c134.069,72.771) 134.069,73.192 cw(c134.069,72.771) 134.367,73.069 cw(c134.664,73.366) U1.J6@134.243,73.366 ; v1@133.931,73.05 cw(c134.358,73.05) U1.J6@134.056,73.353 ; 134.366,69.9 cw(c135.069,69.197) U1.H9@135.069,70.192 ; 134.539,70.074 cw(c135.069,69.544) U1.H9@135.069,70.293 ; 134.712,70.247 cw(c135.069,69.89) U1.H9@135.069,70.395 ; U1.H9@134.903,70.313 ccw(c134.831,70.291) 134.831,70.366 ; U1.H9@134.903,70.419 cw(c134.831,70.441) 134.831,70.366 ; U1.H9@135.069,70.404 U1.H9@135.069,70.366 134.831,70.366 ; U1.G6@135.895,73.366 cw(c135.474,73.366) 135.772,73.069 cw(c136.069,72.771) 136.069,73.192 cw(c136.069,72.771) 136.367,73.069 cw(c136.664,73.366) U1.G6@136.243,73.366 ; v1@136.398,72.863 ccw(c135.977,72.863) 136.275,73.16 ccw(c136.572,73.458) v1@136.572,73.037 ; v1@136.572,72.689 cw(c136.572,72.268) 136.869,72.566 cw(c137.167,72.863) v1@136.746,72.863 ; U1.F7@136.895,72.366 ccw(c136.474,72.366) 136.772,72.663 ccw(c137.069,72.961) U1.F7@137.069,72.54 ; U1.F11@137.069,68.366 137.541,68.838 137.541,69.366 ; U1.F11@137.069,68.54 ccw(c137.069,68.961) 137.367,68.663 ccw(c137.664,68.366) U1.F11@137.243,68.366 ; U1.F9@137.069,70.366 137.077,70.358 137.541,70.358 ; U1.F7@137.069,72.192 cw(c137.069,71.771) 137.367,72.069 cw(c137.664,72.366) U1.F7@137.243,72.366 ; U1.F9@137.192,70.243 cw(c137.47,69.965) 137.47,70.358 ; U1.F9@137.192,70.489 ccw(c137.509,70.806) 137.509,70.358 ; v1@137.418,69.897 ccw(c137.12,70.194) 137.541,70.194 ccw(c137.962,70.194) v1@137.664,69.897 ; v1@137.421,69.648 cw(c137.151,69.366) 137.541,69.366 ; v1@137.661,69.648 ccw(c137.931,69.366) 137.541,69.366 ; U1.E10@137.946,69.243 ccw(c137.649,68.945) 137.649,69.366 ccw(c137.649,69.787) U1.E10@137.946,69.489 ; U1.E10@138.069,69.366 137.541,69.366 ; 132.588,71.366 132.588,71.49 132.954,71.857 133.35,71.857 133.579,72.085 133.579,72.875 ; 132.588,71.366 132.588,70.847 U1.K9@133.069,70.366 133.585,69.85 134.315,69.85 134.831,70.366 ; 133.579,72.875 U1.J6@134.069,73.366 134.613,72.822 135.525,72.822 U1.G6@136.069,73.366 U1.F7@137.069,72.366 137.541,71.894 137.541,70.358 ; 137.541,69.366 v1(137.541,69.774) 137.541,70.358
  Top Layer w0.254: F2.1@103.784,83.261 v4@105.054,83.261 ; F2.1@104.424,82.988 cw(c105.054,82.397) v4@105.054,83.261 ; F2.1@104.424,83.533 ccw(c105.054,84.125) v4@105.054,83.261 ; F2.1@104.48,83.261 ccw(c104.48,83.759) v4@104.833,83.407 ; F2.1@104.481,83.261 cw(c104.481,82.764) v4@104.833,83.116 ; v4@104.781,83.201 ccw(c104.518,83.12) 104.59,83.386 ccw(c104.676,83.707) v4@104.862,83.432 ; v4@104.781,83.322 cw(c104.518,83.403) 104.589,83.136 cw(c104.676,82.813) v4@104.863,83.09
  Bottom Layer w0.152: v4(104.978,83.261) 107.95,83.261 ; v4@105.16,83.08 cw(c105.598,82.641) 105.598,83.261 cw(c105.598,83.881) v4@105.16,83.443 ; C5.1@107.694,83.608 cw(c107.587,83.261) 107.95,83.261 ; C5.1@107.739,83.754 cw(c107.651,83.468) 107.95,83.468 ; 107.95,83.461 cw(c108.246,83.461) C5.1@108.168,83.746 ; C5.1@107.95,85.125 107.95,83.261 ; C5.1@108.209,83.599 ccw(c108.301,83.261) 107.95,83.261 ; C10.1@132.287,73.545 ccw(c131.991,73.248) 131.991,73.668 ccw(c131.991,74.088) C10.1@132.287,73.791 ; C10.1@132.41,73.668 131.843,73.668 131.14,74.371 120.726,74.371 120.523,74.574 120.523,80.416 120.396,80.543 112.319,80.543 110.668,82.194 109.017,82.194 107.95,83.261
  Bottom Layer w0.203: C10.1@132.41,73.668 C15.1@133.368,73.668 133.756,73.668 ; C10.1@132.515,73.563 cw(c132.768,73.31) 132.768,73.668 cw(c132.768,74.026) C10.1@132.515,73.773 ; C15.1@133.263,73.563 ccw(c133.01,73.31) 133.01,73.668 ccw(c133.01,74.026) C15.1@133.263,73.773 ; C15.1@133.473,73.563 cw(c133.726,73.31) 133.726,73.668 cw(c133.726,74.026) C15.1@133.473,73.773 ; v1@133.669,73.138 ccw(c133.458,73.348) 133.756,73.348 ccw(c134.054,73.348) v1@133.844,73.138 ; v1@133.754,73.05 v1(133.756,73.05) 133.756,73.668 ; C9.1@134.221,73.563 ccw(c133.968,73.31) 133.968,73.668 ccw(c133.968,74.026) C9.1@134.221,73.773 ; C9.1@134.431,73.563 cw(c134.684,73.31) 134.684,73.668 cw(c134.684,74.026) C9.1@134.431,73.773 ; C18.1@135.179,73.563 ccw(c134.926,73.31) 134.926,73.668 ccw(c134.926,74.026) C18.1@135.179,73.773 ; C18.1@135.389,73.563 cw(c135.642,73.31) 135.642,73.668 cw(c135.642,74.026) C18.1@135.389,73.773 ; C14.1@136.137,73.563 ccw(c135.884,73.31) 135.884,73.668 ccw(c135.884,74.026) C14.1@136.137,73.773 ; C14.1@136.168,73.489 cw(c135.772,72.794) v1@136.572,72.794 ; C14.1@136.269,73.666 cw(c135.971,73.144) 136.572,73.144 ; C14.1@136.347,73.563 cw(c136.6,73.31) 136.6,73.668 cw(c136.6,74.026) C14.1@136.347,73.773 ; C14.1@136.37,73.842 cw(c136.171,73.494) 136.572,73.494 ; v1@136.465,72.925 ccw(c136.26,73.043) 136.489,73.105 ; 136.467,73.188 ccw(c136.813,73.281) v1@136.634,72.97 ; v1@136.485,72.95 ccw(c136.274,73.161) 136.572,73.161 ccw(c136.87,73.161) v1@136.659,72.95 ; v1(136.572,72.863) 136.572,73.664 ; C22.1@137.095,73.563 ccw(c136.842,73.31) 136.842,73.668 ccw(c136.842,74.026) C22.1@137.095,73.773 ; C22.1@137.305,73.563 cw(c137.558,73.31) 137.558,73.668 cw(c137.558,74.026) C22.1@137.305,73.773 ; v1(137.541,69.774) 138.024,69.774 138.328,69.469 139.175,69.469 139.429,69.215 C11.1@139.429,68.504 C3.1@139.429,67.64 ; v1@137.628,69.687 cw(c137.839,69.476) 137.839,69.774 cw(c137.839,70.072) v1@137.628,69.861 ; C19.1@138.053,73.563 ccw(c137.8,73.31) 137.8,73.668 ccw(c137.8,74.026) C19.1@138.053,73.773 ; C19.1@138.263,73.563 cw(c138.516,73.31) 138.516,73.668 cw(c138.516,74.026) C19.1@138.263,73.773 ; 138.775,69.469 cw(c138.775,68.764) C16.1@139.274,69.262 ; C6.1@139.011,73.563 ccw(c138.758,73.31) 138.758,73.668 ccw(c138.758,74.026) C6.1@139.011,73.773 ; C6.1@139.116,73.668 C19.1@138.158,73.668 C22.1@137.2,73.668 C14.1@136.242,73.668 C18.1@135.284,73.668 C9.1@134.326,73.668 133.756,73.668 ; C3.1@139.324,67.745 ccw(c139.07,67.998) 139.429,67.998 ccw(c139.787,67.998) C3.1@139.534,67.745 ; C11.1@139.324,68.399 cw(c139.07,68.146) 139.429,68.146 cw(c139.787,68.146) C11.1@139.534,68.399 ; C11.1@139.324,68.609 ccw(c139.07,68.862) 139.429,68.862 ccw(c139.787,68.862) C11.1@139.534,68.609 ; C16.1@139.324,69.262 cw(c139.07,69.009) 139.429,69.009 cw(c139.787,69.009) C16.1@139.534,69.262
1V0_IN: C63.1 D3.1 D6.2 F2.2 U5.5 | length 14.6
  Top Layer w0.381: D3.1@99.636,87.501 cw(c99.065,86.93) 99.873,86.93 cw(c100.681,86.93) D3.1@100.11,87.501 ; U5.5@99.721,85.863 ccw(c99.355,86.229) 99.873,86.229 ; U5.5@99.873,85.827 D3.1@99.873,88.087 ; 99.898,86.411 F2.2@103.784,86.411 ; v2@99.933,86.928 ccw(c101.18,88.175) 101.18,86.411 ; C63.1@101.35,85.684 ccw(c100.993,86.042) 101.498,86.042 ccw(c102.004,86.042) C63.1@101.647,85.684 ; C63.1@101.498,85.536 101.498,86.386 ; F2.2@103.198,86.174 ccw(c102.627,85.603) 102.627,86.411 ccw(c102.627,87.219) F2.2@103.198,86.648
  Bottom Layer w0.381: D6.2@99.636,87.501 cw(c99.065,86.93) 99.873,86.93 cw(c100.681,86.93) D6.2@100.11,87.501 ; v2(99.873,86.868) D6.2@99.873,88.087
1V8: C4.1 C7.1 C12.1 C17.1 C20.1 C23.1 F4.1 FB1.1 U1.F8 U1.G10 U1.J10 U1.K11 U1.L10 | length 59.9
  Top Layer w0.102: U1.L10@132.069,69.192 cw(c132.069,68.68) 132.431,69.042 ; U1.L10@132.069,69.293 cw(c132.069,69.027) 132.257,69.215 ; U1.L10@132.069,69.366 132.107,69.366 132.588,68.885 133.588,68.885 U1.J10@134.069,69.366 134.314,69.366 ; U1.L10@132.243,69.366 ccw(c132.573,69.366) 132.34,69.133 ; U1.K11@132.946,68.489 ccw(c132.649,68.787) 133.069,68.787 ccw(c133.49,68.787) U1.K11@133.192,68.489 ; U1.K11@133.069,68.366 133.069,68.866 ; U1.J10@133.895,69.366 cw(c133.474,69.366) 133.772,69.069 cw(c134.069,68.771) U1.J10@134.069,69.192 ; U1.J10@134.069,69.337 ccw(c134.069,69.857) 134.437,69.489 ; U1.J10@134.069,69.439 ccw(c134.069,70.204) 134.611,69.663 ; U1.J10@134.069,69.54 ccw(c134.069,70.551) 134.784,69.836 ; U1.J10@134.234,69.309 cw(c134.314,69.281) 134.314,69.366 ; U1.J10@134.234,69.423 ccw(c134.314,69.451) 134.314,69.366 ; v1@135.446,69.742 ccw(c135.148,69.445) 135.148,69.866 ccw(c135.148,70.286) 135.446,69.989 ccw(c135.146,70.288) 135.57,70.288 ; v1@135.569,69.691 cw(c135.569,69.269) 135.868,69.568 ; v1(135.569,69.866) 134.813,69.866 134.314,69.366 ; 135.57,70.284 ccw(c135.987,70.284) v1@135.692,69.989 ; v1@135.743,69.866 ccw(c136.162,69.866) 135.866,69.57 ; U1.G10@135.895,69.366 ccw(c135.474,69.366) 135.772,69.663 ccw(c136.069,69.961) U1.G10@136.069,69.54 ; U1.G10@136.069,69.366 v1(135.569,69.866) 135.57,70.546 135.897,70.873 136.576,70.873 U1.F8@137.069,71.366 ; U1.F8@136.895,71.366 cw(c136.474,71.366) 136.772,71.069 cw(c137.069,70.771) U1.F8@137.069,71.192
  Top Layer w0.33: F4.1@110.185,73.64 cw(c109.571,73.025) 110.439,73.025 cw(c111.308,73.025) F4.1@110.694,73.64 ; v2@110.439,72.238 F4.1@110.439,74.244
  Bottom Layer w0.203: v2@110.439,72.115 cw(c110.439,71.696) 110.735,71.992 cw(c111.031,72.288) v2@110.613,72.288 ; v2(110.439,72.288) 111.328,71.399 130.036,71.399 131.547,69.889 C4.1@131.547,68.801 ; C4.1@131.442,68.956 ccw(c131.188,69.209) 131.547,69.209 ccw(c131.905,69.209) C4.1@131.652,68.956 ; C4.1@131.652,68.696 cw(c131.905,68.442) 131.905,68.801 cw(c131.905,69.159) C4.1@131.652,68.906 ; C4.1@131.676,68.728 cw(c131.801,68.657) 131.801,68.801 ; C4.1@131.676,68.873 ccw(c131.801,68.944) 131.801,68.801 ; C20.1@132.508,68.696 ccw(c132.255,68.442) 132.255,68.801 ccw(c132.255,69.159) C20.1@132.508,68.906 ; C20.1@132.718,68.696 cw(c132.972,68.442) 132.972,68.801 cw(c132.972,69.159) C20.1@132.718,68.906 ; C7.1@133.499,68.696 ccw(c133.246,68.442) 133.246,68.801 ccw(c133.246,69.159) C7.1@133.499,68.906 ; C7.1@133.709,68.696 cw(c133.962,68.442) 133.962,68.801 cw(c133.962,69.159) C7.1@133.709,68.906 ; 134.813,68.558 ccw(c134.813,69.573) C17.1@135.531,68.856 ; 135.304,68.558 ccw(c135.304,69.083) C17.1@135.675,68.712 ; C17.1@135.442,68.607 135.394,68.558 134.362,68.558 134.12,68.801 C7.1@133.604,68.801 C20.1@132.613,68.801 131.801,68.801 ; v1@135.482,69.778 cw(c135.271,69.568) 135.569,69.568 cw(c135.867,69.568) 135.656,69.778 cw(c135.867,69.568) 135.867,69.866 cw(c135.867,70.164) v1@135.656,69.953 ; C17.1@135.569,68.868 v1(135.569,69.866) 136.789,69.866 137.338,69.317 C23.1@137.338,68.801 C12.1@138.328,68.801 ; 135.569,69.371 ccw(c136.156,69.371) C17.1@135.741,68.956 ; FB1.1@135.937,70.338 cw(c135.684,70.085) 136.042,70.085 cw(c136.401,70.085) FB1.1@136.147,70.338 ; 136.042,69.866 FB1.1@136.042,70.366 ; C23.1@137.233,68.956 ccw(c136.98,69.209) 137.338,69.209 ccw(c137.696,69.209) C23.1@137.443,68.956 ; C23.1@137.443,68.696 cw(c137.696,68.442) 137.696,68.801 cw(c137.696,69.159) C23.1@137.443,68.906 ; C12.1@138.223,68.696 ccw(c137.97,68.442) 137.97,68.801 ccw(c137.97,69.159) C12.1@138.223,68.906
1V8_IN: C65.1 D1.1 D8.2 F4.2 U4.12 U4.13 U4.14 | length 21.7
  Top Layer w0.33: D1.1@99.619,71.597 ccw(c99.004,72.212) 99.873,72.212 ccw(c100.742,72.212) D1.1@100.127,71.597 ; 99.784,71.878 cw(c100.082,71.798) v2@99.928,72.066 ; v2@99.818,72.066 cw(c99.663,71.797) 99.963,71.878 ; D1.1@99.873,70.993 99.873,73.889 99.985,74.001 U4.12@101.199,74.001 102.627,74.001 102.768,74.143 102.768,74.651 ; U4.13@101.199,74.651 102.768,74.651 ; U4.14@101.199,75.301 102.499,75.301 102.768,75.032 102.768,74.651 ; C65.1@105.066,74.018 ccw(c104.665,74.419) 105.232,74.419 ccw(c105.799,74.419) C65.1@105.398,74.018 ; C65.1@105.232,73.852 105.232,74.6 ; 106.283,74.651 cw(c106.283,73.588) F4.2@107.035,74.34 ; 106.558,74.651 ccw(c106.558,75.325) F4.2@107.035,74.849 ; F4.2@107.213,74.651 102.768,74.651
  Bottom Layer w0.33: D8.2@99.63,71.608 ccw(c99.123,72.161) v2(99.873,72.161) ; D8.2@99.873,70.993 v2(99.873,72.161) ; D8.2@100.116,71.608 cw(c100.623,72.161) v2(99.873,72.161)